# EAGLE board SchemaRobotV1.0 (EAGLE 8.7.0)
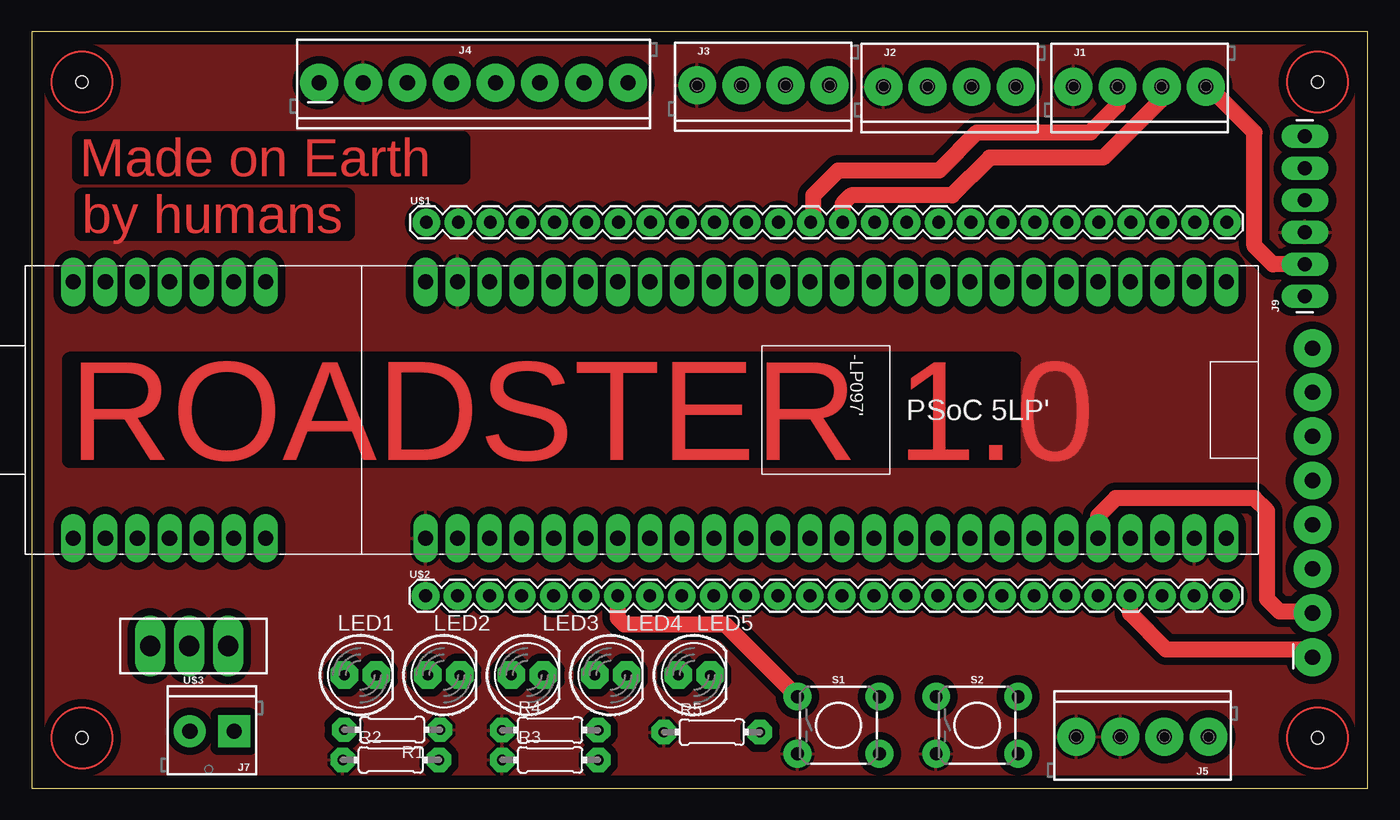
[diagram p0: board, top side]
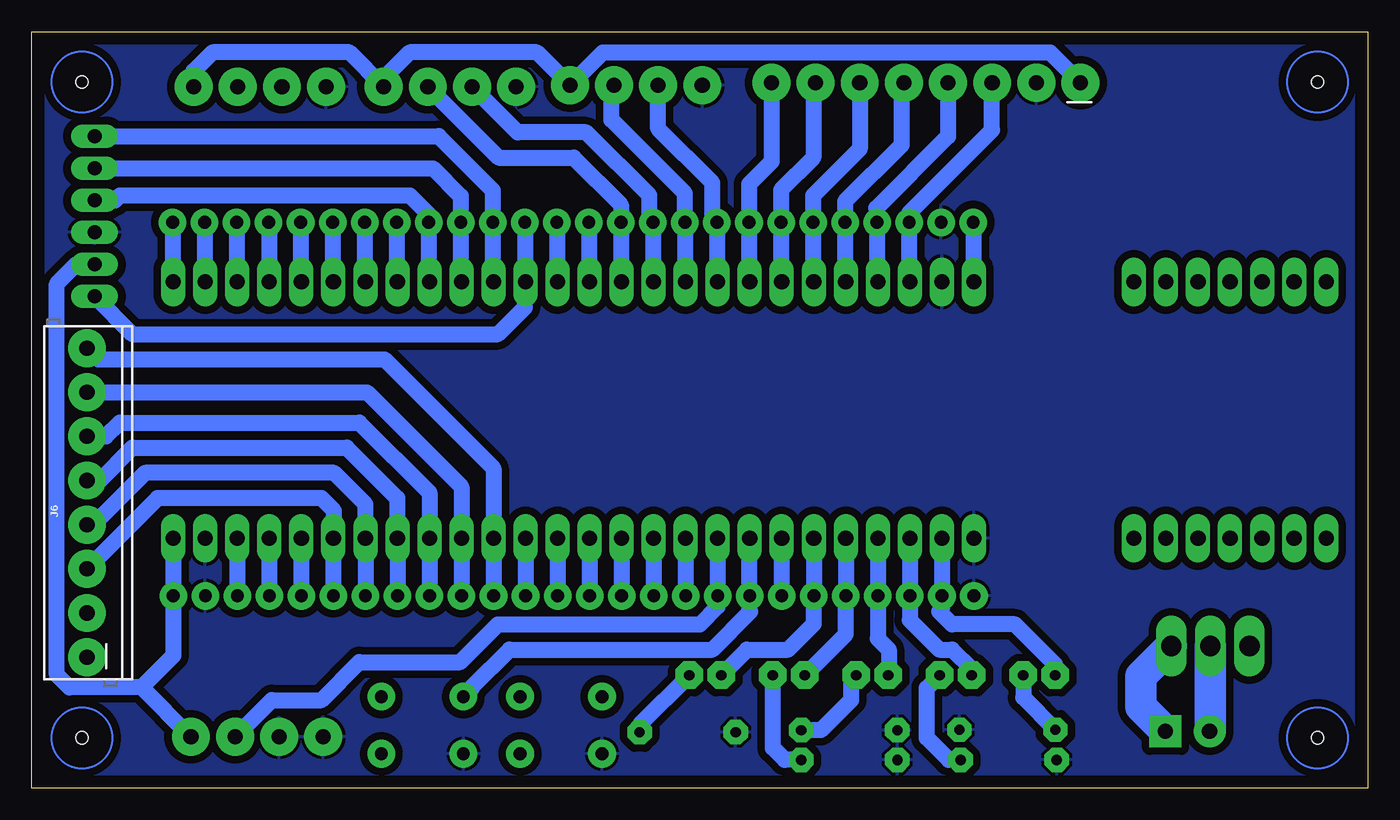
[diagram p1: board, bottom side, seen from below]

Size 106 x 60 mm. Coordinates in mm from the lower left corner, seen from the top.
Outline: 0,0 106,0 106,60 0,60 0,0
Copper layers (1*16): Top 0.035mm / dielectric 1.5mm / Bottom 0.035mm
Design rules "default *": minimum track width 6mil, minimum drill 0.35mm, track to track 10mil, track to pad 10mil, pad to pad 10mil, via to via 10mil, smd to smd 6mil, copper to edge 40mil, drill to drill 6mil, minimum pad ring 10mil, minimum via ring 8mil, stop-mask expansion 4mil, vias tented up to drill 0mil, thermal gap 10mil
Net classes: 0 default: width 0.406 mm; 1 Ground: width 0.61 mm; 2 fromBat: width 0.61 mm; 3 toBat: width 0.61 mm
Holes 1 mm at 4,4 102,4 4,56 102,56

## Footprints (pad centres in the part's own frame; a part is rotated, then mirrored left to right if it is on the bottom)
CYPRESSFOOTPRINT_CYPRESSFOOTPRINT = drill 1.2 pad 1.93 long: B_12.0/I2C(SCL) -36.83,10.16; B_12.1/I2C(SDA) -39.37,10.16; B_12.6/UARTRX -41.91,10.16; B_12.7/UARTTX -44.45,10.16; B_GND1 -29.21,-10.16; B_GND2 -31.75,10.16; B_P0.0 -41.91,-10.16; B_P0.1 -44.45,-10.16; B_P3.0 -31.75,-10.16; B_P3.4 -34.29,-10.16; B_P3.5 -36.83,-10.16; B_P3.6 -39.37,-10.16; B_P12.5 -34.29,10.16; B_VBUS -29.21,10.16; GND -13.97,10.16; GND3 -16.51,-10.16; GND4 44.45,-10.16; P0.0 21.59,-10.16; P0.1 24.13,-10.16; P0.2/SAR1 26.67,-10.16; P0.3/EXT_REF0 29.21,-10.16; P0.4/SAR0 31.75,-10.16; P0.5 34.29,-10.16; P0.6 36.83,-10.16; P0.7 39.37,-10.16; P1.0/SWDIO 6.35,10.16; P1.1/SWDCLK 3.81,10.16; P1.2 1.27,10.16; P1.3 -1.27,10.16; P1.4 -3.81,10.16; P1.5 -6.35,10.16; P1.6 -8.89,10.16; P1.7 -11.43,10.16; P2.0 46.99,10.16; P2.1/LED1 44.45,10.16; P2.2/SW1 41.91,10.16; P2.3 39.37,10.16; P2.4 36.83,10.16; P2.5 34.29,10.16; P2.6 31.75,10.16; P2.7 29.21,10.16; P3.0 -13.97,-10.16; P3.1 -11.43,-10.16; P3.2 -8.89,-10.16; P3.3 -6.35,-10.16; P3.4 -3.81,-10.16; P3.5 -1.27,-10.16; P3.6 1.27,-10.16; P3.7 3.81,-10.16; P12.0/I2C(SCL) 8.89,10.16; P12.1/I2C(SDA) 11.43,10.16; P12.2 13.97,10.16; P12.3 16.51,10.16; P12.4 19.05,10.16; P12.5 21.59,10.16; P12.6/UARTRX 24.13,10.16; P12.7/UARTTX 26.67,10.16; P15.0 6.35,-10.16; P15.1 8.89,-10.16; P15.2/XTAL_OUT 11.43,-10.16; P15.3/XTAL_IN 13.97,-10.16; P15.4/CMOD 16.51,-10.16; P15.5 19.05,-10.16; RESET 41.91,-10.16; VDDIO -16.51,10.16; VVD 46.99,-10.16
SPARKFUN-CONNECTORS_SCREWTERMINAL-3.5MM-4 = drill 1.2 pad 3: 1 0,0; 2 3.5,0; 3 7,0; 4 10.5,0
SPARKFUN-CONNECTORS_SCREWTERMINAL-3.5MM-8 = drill 1.2 pad 3: 1 0,0; 2 3.5,0; 3 7,0; 4 10.5,0; 5 14,0; 6 17.5,0; 7 21,0; 8 24.5,0
SPARKFUN-CONNECTORS_SCREWTERMINAL-3.5MM-2 = drill 1.2 pad 2.54 square: 1 0,0 | drill 1.2 pad 2.54: 2 3.5,0
SPARKFUN-CONNECTORS_1X06_LONGPADS = drill 1.118 pad 1.88 long: 1 0,0; 2 2.54,0; 3 5.08,0; 4 7.62,0; 5 10.16,0; 6 12.7,0
LED_LED5MM = drill 0.813 pad 2.184 octagon: A -1.27,0; K 1.27,0
EAGLE-LTSPICE_0204/7 = drill 0.813 pad 1.93 octagon: 1 -3.81,0; 2 3.81,0
SPARKFUN-SWITCHES_TACTILE_SWITCH_PTH_6.0MM = drill 1.016 pad 2.184: 1 -3.251,2.261; 2 3.251,2.261; 3 -3.251,-2.261; 4 3.251,-2.261
SPARKFUN-CONNECTORS_1X26 = drill 1.016 pad 2.184: 1 0,0; 2 2.54,0; 3 5.08,0; 4 7.62,0; 5 10.16,0; 6 12.7,0; 7 15.24,0; 8 17.78,0; 9 20.32,0; 10 22.86,0; 11 25.4,0; 12 27.94,0; 13 30.48,0; 14 33.02,0; 15 35.56,0; 16 38.1,0; 17 40.64,0; 18 43.18,0; 19 45.72,0; 20 48.26,0; 21 50.8,0; 22 53.34,0; 23 55.88,0; 24 58.42,0; 25 60.96,0; 26 63.5,0
SPARKFUN-SWITCHES_SWITCH_SPDT_PTH_11.6X5.60MM = drill 1.6 pad 1.88 long: 1 2.286,-2.4; 2 2.286,-5.5; 3 2.286,-8.6

## Placement (x,y rotation side)
DEVICE1  CYPRESSFOOTPRINT_CYPRESS  [CYPRESSFOOTPRINT_CYPRESSFOOTPRINT]  47.77,29.99 0 top
J1  Connector US1  [SPARKFUN-CONNECTORS_SCREWTERMINAL-3.5MM-4]  82.64,55.63 0 top
J2  Connector US 2  [SPARKFUN-CONNECTORS_SCREWTERMINAL-3.5MM-4]  67.57,55.63 0 top
J3  Connector US 3  [SPARKFUN-CONNECTORS_SCREWTERMINAL-3.5MM-4]  52.8,55.73 0 top
J4  Connector H-Brug  [SPARKFUN-CONNECTORS_SCREWTERMINAL-3.5MM-8]  22.81,55.93 0 top
J5  Connector IR voeding  [SPARKFUN-CONNECTORS_SCREWTERMINAL-3.5MM-4]  93.36,4.08 180 top
J6  Connector IR signalen  [SPARKFUN-CONNECTORS_SCREWTERMINAL-3.5MM-8]  101.6,10.4 90 bottom
J7  Connector batterij 12v  [SPARKFUN-CONNECTORS_SCREWTERMINAL-3.5MM-2]  16.06,4.51 180 top
J9  Connector HC-05  [SPARKFUN-CONNECTORS_1X06_LONGPADS]  101,39 90 top
LED1  3.3V  [LED_LED5MM]  26.08,8.97 0 top
LED2  3.3V  [LED_LED5MM]  32.7,8.97 0 top
LED3  3.3V  [LED_LED5MM]  39.32,8.97 0 top
LED4  3.3V  [LED_LED5MM]  45.94,8.97 0 top
LED5  3.3V  [LED_LED5MM]  52.56,8.97 0 top
R1  100 ohm  [EAGLE-LTSPICE_0204/7]  28.6,4.64 180 top
R2  100 ohm  [EAGLE-LTSPICE_0204/7]  28.5,2.25 0 top
R3  100 ohm  [EAGLE-LTSPICE_0204/7]  41.14,2.25 0 top
R4  100 ohm  [EAGLE-LTSPICE_0204/7]  41.14,4.61 0 top
R5  100 ohm  [EAGLE-LTSPICE_0204/7]  53.96,4.45 0 top
S1  SPARKFUN-SWITCHES_MOMENTARY-SWITCH-SPST-PTH-6.0MM  [SPARKFUN-SWITCHES_TACTILE_SWITCH_PTH_6.0MM]  64,5 0 top
S2  SPARKFUN-SWITCHES_MOMENTARY-SWITCH-SPST-PTH-6.0MM  [SPARKFUN-SWITCHES_TACTILE_SWITCH_PTH_6.0MM]  75,5 0 top
U$1  SPARKFUN-CONNECTORS_CONN_26  [SPARKFUN-CONNECTORS_1X26]  31.32,44.87 0 top
U$2  SPARKFUN-CONNECTORS_CONN_26  [SPARKFUN-CONNECTORS_1X26]  31.25,15.25 0 top
U$3  SPARKFUN-SWITCHES_SWITCH_GOTRON  [SPARKFUN-SWITCHES_SWITCH_SPDT_PTH_11.6X5.60MM]  7,9 90 top

## Library data of the parts
DEVICE1 = Board_1_23
J1-J3 J5 = SchemaRobotV1.0; PROD_ID: 2xCONN-08399; SF_ID: 2xPRT-08084
J4 J6 J9 LED1-LED5 U$1-U$3 = SchemaRobotV1.0
J7 = SchemaRobotV1.0; PROD_ID: CONN-08399
R1-R5 = SchemaRobotV1.0; SPICEMODEL: NONE; SPICEPREFIX: R
S1 S2 = SchemaRobotV1.0; PROD_ID: SWCH-08441; SF_SKU: COM-00097

## Nets
GND [Ground]: DEVICE1.GND DEVICE1.GND3 DEVICE1.GND4 J1.1 J2.1 J3.1 J4.2 J5.3 J5.4 J9.3 R1.1 R2.1 R3.1 R4.1 R5.1 S1.3 S2.3 U$1.2 U$2.1 U$2.25
N$1: J7.2 U$3.2
N$2: LED1.K R1.2
N$3: LED2.K R2.2
N$4: LED3.K R4.2
N$5: LED4.K R3.2
N$6: LED5.K R5.2
N$7: J7.1 U$3.3
P0.0: DEVICE1.P0.0 J6.8 U$2.16
P0.1: DEVICE1.P0.1 J6.7 U$2.17
P0.2: DEVICE1.P0.2/SAR1 J6.6 U$2.18
P0.3: DEVICE1.P0.3/EXT_REF0 J6.5 U$2.19
P0.4: DEVICE1.P0.4/SAR0 J6.4 U$2.20
P0.5: DEVICE1.P0.5 J6.3 U$2.21
P0.6: DEVICE1.P0.6 J6.2 U$2.22
P0.7: DEVICE1.P0.7 J6.1 U$2.23
P1.0: DEVICE1.P1.0/SWDIO J3.3 U$1.10
P1.1: DEVICE1.P1.1/SWDCLK J3.2 U$1.9
P1.2: DEVICE1.P1.2 J4.8 U$1.8
P1.3: DEVICE1.P1.3 J4.7 U$1.7
P1.4: DEVICE1.P1.4 J4.6 U$1.6
P1.5: DEVICE1.P1.5 J4.5 U$1.5
P1.6: DEVICE1.P1.6 J4.4 U$1.4
P1.7: DEVICE1.P1.7 J4.3 U$1.3
P2.0: DEVICE1.P2.0 U$1.26
P2.1: DEVICE1.P2.1/LED1 U$1.25
P2.2: DEVICE1.P2.2/SW1 U$1.24
P2.3: DEVICE1.P2.3 U$1.23
P2.4: DEVICE1.P2.4 U$1.22
P2.5: DEVICE1.P2.5 U$1.21
P2.6: DEVICE1.P2.6 U$1.20
P2.7: DEVICE1.P2.7 U$1.19
P3.0: DEVICE1.P3.0 LED1.A U$2.2
P3.1: DEVICE1.P3.1 LED2.A U$2.3
P3.2: DEVICE1.P3.2 LED3.A U$2.4
P3.3: DEVICE1.P3.3 LED4.A U$2.5
P3.4: DEVICE1.P3.4 LED5.A U$2.6
P3.5: DEVICE1.P3.5 S1.1 U$2.7
P3.6: DEVICE1.P3.6 S2.1 U$2.8
P3.7: DEVICE1.P3.7 J5.2 U$2.9
P12.0: DEVICE1.P12.0/I2C(SCL) J2.2 U$1.11
P12.1: DEVICE1.P12.1/I2C(SDA) J2.3 U$1.12
P12.2: DEVICE1.P12.2 J1.2 U$1.13
P12.3: DEVICE1.P12.3 J1.3 U$1.14
P12.4: DEVICE1.P12.4 J9.1 U$1.15
P12.5: DEVICE1.P12.5 J9.6 U$1.16
P12.6: DEVICE1.P12.6/UARTRX J9.5 U$1.17
P12.7: DEVICE1.P12.7/UARTTX J9.4 U$1.18
P15.0: DEVICE1.P15.0 U$2.10
P15.1: DEVICE1.P15.1 U$2.11
P15.2: DEVICE1.P15.2/XTAL_OUT U$2.12
P15.3: DEVICE1.P15.3/XTAL_IN U$2.13
P15.4: DEVICE1.P15.4/CMOD U$2.14
P15.5: DEVICE1.P15.5 U$2.15
RESET: DEVICE1.RESET U$2.24
VCC: DEVICE1.VVD J1.4 J2.4 J3.4 J4.1 J5.1 J9.2 U$2.26
VDDIO: DEVICE1.VDDIO U$1.1

## Tracks (layer width: path | path; a pad name or v marks a point on that pad's centre or on a via)
GND
  pour Top (isolate 0.6): 0,60 106,60 106,59 106,0 0,0
  pour Bottom (isolate 0.6): 0,60 106,60 106,0 0,0
N$1
  Bottom 2.5: U$3.2 12.5,4.57 J7.2
N$2
  Bottom 1.27: LED1.K 27.35,7.2 R1.2
N$3
  Bottom 1.27: LED2.K 35,7.94 35,4 33.25,2.25 R2.2
N$4
  Bottom 1.27: LED3.K 41,8.56 41,7 43.39,4.61 R4.2
N$5
  Bottom 1.27: R3.2 46.25,2.25 47.21,3.21 LED4.K
N$6
  Bottom 1.27: LED5.K 57.77,5.03 R5.2
N$7
  Bottom 2.5: U$3.3 18,8.89 18,6.45 J7.1
P0.0
  Bottom 1.27: U$2.16 DEVICE1.P0.0 69.36,25.36 78,34 100.7,34 J6.8
P0.1
  Bottom 1.27: U$2.17 DEVICE1.P0.1 71.9,23.9 79.4,31.4 J6.7
P0.2
  Bottom 1.27: U$2.18 DEVICE1.P0.2/SAR1 74.44,23.44 80,29 99,29 100.1,27.9 J6.6
P0.3
  Bottom 1.27: U$2.19 DEVICE1.P0.3/EXT_REF0 77,19.85 77,23 81,27 98,27 100.6,24.4 J6.5
P0.4
  Bottom 1.27: U$2.20 DEVICE1.P0.4/SAR0 79.52,22.52 82,25 97,25 101.1,20.9 J6.4
P0.5
  Bottom 1.27: U$2.21 DEVICE1.P0.5 82,19.89 82,22 83,23 96,23 J6.3
P0.6
  Top 1.27: J6.2 101.5,14 99,14 98,15 98,22 97,23 86,23 84.6,21.6 DEVICE1.P0.6
  Bottom 1.27: DEVICE1.P0.6 U$2.22
P0.7
  Top 1.27: J6.1 101,11 90,11 87.13,13.87 U$2.23
  Bottom 1.27: DEVICE1.P0.7 U$2.23
P1.0
  Bottom 1.27: DEVICE1.P1.0/SWDIO 54,40.03 54,40 54.17,40.17 U$1.10 54.17,47.17 60,53 60,55.53 J3.3
P1.1
  Bottom 1.27: DEVICE1.P1.1/SWDCLK 51.63,40.2 U$1.9 52,45.24 52,48 56.3,52.3 J3.2
P1.2
  Bottom 1.27: DEVICE1.P1.2 49.09,40.2 U$1.8 49.09,47.91 47.31,49.69 J4.8
P1.3
  Bottom 1.27: DEVICE1.P1.3 46.55,40.2 U$1.7 46.55,47.45 44,50 44,55.74 J4.7
P1.4
  Bottom 1.27: DEVICE1.P1.4 44.02,40.2 U$1.6 44.02,46.98 40.31,50.69 J4.6
P1.5
  Bottom 1.27: DEVICE1.P1.5 41.48,40.2 U$1.5 41.48,46.52 37,51 37,55.74 J4.5
P1.6
  Bottom 1.27: DEVICE1.P1.6 38.94,40.2 U$1.4 39,44.94 39,46 33.31,51.69 J4.4
P1.7
  Bottom 1.27: DEVICE1.P1.7 36.4,40.2 U$1.3 36.4,45.6 29.81,52.19 J4.3
P2.0
  Bottom 1.27: U$1.26 94.81,40.2 DEVICE1.P2.0
P2.1
  Bottom 1.27: U$1.25 92.28,40.2 DEVICE1.P2.1/LED1
P2.2
  Bottom 1.27: U$1.24 89.73,40.2 DEVICE1.P2.2/SW1
P2.3
  Bottom 1.27: U$1.23 87.14,44.82 DEVICE1.P2.3
P2.4
  Bottom 1.27: U$1.22 84.66,40.2 DEVICE1.P2.4
P2.5
  Bottom 1.27: U$1.21 82.11,40.2 DEVICE1.P2.5
P2.6
  Bottom 1.27: U$1.20 79.58,40.2 DEVICE1.P2.6
P2.7
  Bottom 1.27: U$1.19 77.03,40.2 DEVICE1.P2.7
P3.0
  Bottom 1.27: DEVICE1.P3.0 U$2.2 33.79,14.21 34,14 33,13 28,13 24.81,9.81 LED1.A
P3.1
  Bottom 1.27: DEVICE1.P3.1 U$2.3 36.33,13.33 34,11 33,11 31.43,9.43 LED2.A
P3.2
  Bottom 1.27: DEVICE1.P3.2 U$2.4 38.87,11.87 38,11 38,9.02 LED3.A
P3.3
  Bottom 1.27: DEVICE1.P3.3 U$2.5 | U$2.5 | LED4.A 41.42,12.22 U$2.5
P3.4
  Bottom 1.27: DEVICE1.P3.4 U$2.6 | U$2.6 | LED5.A 49.26,11 46,11 43.96,13.04 U$2.6
P3.5
  Top 1.27: U$2.7 46.49,13.51 47,13 55,13 60.74,7.26 S1.1
  Bottom 1.27: DEVICE1.P3.5 U$2.7
P3.6
  Bottom 1.27: S2.1 71.08,7.93 71.08,8.02 68.1,11 52,11 49,14 49.04,14.04 U$2.8 | U$2.8 | U$2.8 DEVICE1.P3.6
P3.7
  Bottom 1.27: DEVICE1.P3.7 U$2.9 | U$2.9 | J5.2 86.94,7 83,7 80,10 72,10 69,13 53,13 51.58,14.42 U$2.9
P12.0
  Bottom 1.27: DEVICE1.P12.0/I2C(SCL) 56.72,40.2 U$1.11 57,45.16 57,47 62,52 67.44,52 J2.2
P12.1
  Bottom 1.27: DEVICE1.P12.1/I2C(SDA) 59.26,40.2 U$1.12 59.26,46.26 63,50 68.94,50 J2.3
P12.2
  Top 1.27: U$1.13 62,45.08 62,47 64,49 72,49 75,52 84,52 86.14,54.14 J1.2
  Bottom 1.27: U$1.13 61.8,40.2 DEVICE1.P12.2
P12.3
  Top 1.27: J1.3 89.64,54.64 85,50 76,50 73,47 65,47 64.33,46.34 U$1.14
  Bottom 1.27: U$1.14 64.33,40.2 DEVICE1.P12.3
P12.4
  Bottom 1.27: U$1.15 66.88,40.2 | 66.88,40.2 DEVICE1.P12.4 | J9.1 98,36 69,36 66.88,38.12 66.88,40.2
P12.5
  Bottom 1.27: J9.6 73.7,51.7 69.42,47.41 U$1.16 69.42,40.2 DEVICE1.P12.5
P12.6
  Bottom 1.27: J9.5 74.16,49.16 71.95,46.95 U$1.17 71.95,40.2 DEVICE1.P12.6/UARTRX
P12.7
  Bottom 1.27: J9.4 99.38,46.62 99,47 76,47 74.5,45.49 U$1.18 74.5,40.2 DEVICE1.P12.7/UARTTX
P15.0
  Bottom 1.27: DEVICE1.P15.0 U$2.10
P15.1
  Bottom 1.27: DEVICE1.P15.1 U$2.11
P15.2
  Bottom 1.27: DEVICE1.P15.2/XTAL_OUT U$2.12
P15.3
  Bottom 1.27: DEVICE1.P15.3/XTAL_IN U$2.13
P15.4
  Bottom 1.27: DEVICE1.P15.4/CMOD U$2.14
P15.5
  Bottom 1.27: DEVICE1.P15.5 U$2.15
RESET
  Bottom 1.27: DEVICE1.RESET U$2.24
VCC
  Top 1.27: J9.2 98.46,41.54 97,43 97,52 93.37,55.63 J1.4
  Bottom 1.27: DEVICE1.VVD U$2.26 94.75,10.53 97.28,8 | J5.1 97.28,8 | 97.28,8 103,8 104,9 104,40 102.46,41.54 J9.2 | J4.1 25.23,58.35 60.68,58.35 J3.4 65.92,58.35 76,58.35 78.07,56.28 J2.4 80.79,58.35 91.65,58.35 93.14,56.86 J1.4
VDDIO
  Bottom 1.27: U$1.1 31.32,40.2 DEVICE1.VDDIO
(copper drawn outside any net)
  shapes: Bottom circle x4, Top circle x4

## Text on the board
Top: Made on Earth | by humans | ROADSTER 1.0